# Altium PCB pcbsumo.PcbDoc
Units mm, origin at the board's own origin, x right, y up, seen from the top; angles counter-clockwise.
Board outline 79.88 x 72.38 mm, 2 copper layers (Top Layer, Bottom Layer); 32 components, 29 nets, 130 pads, 0 vias.
Unrouted connection lines stored in the file: 78.
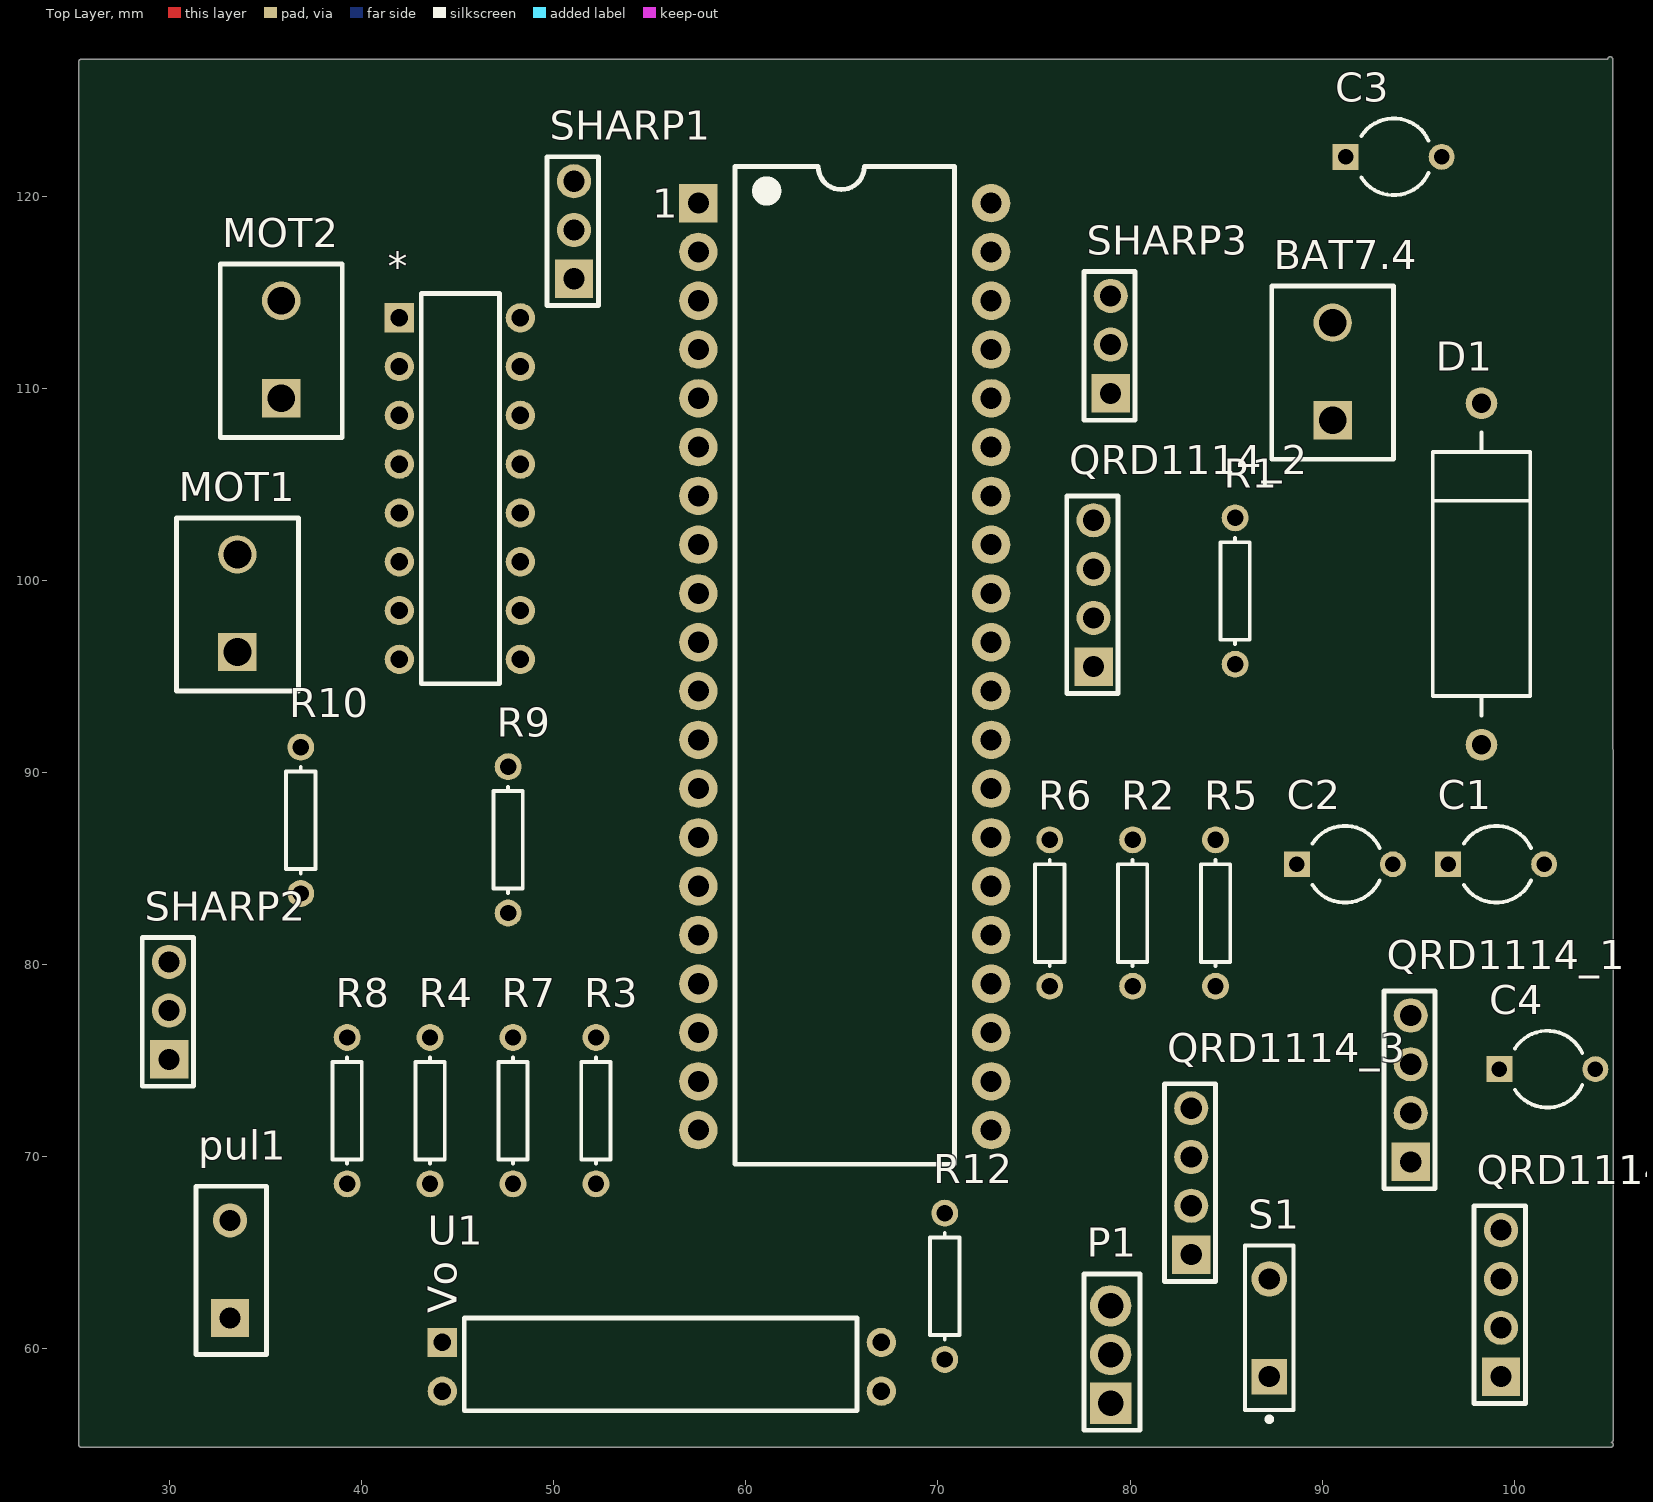
[diagram p0: Top Layer view]
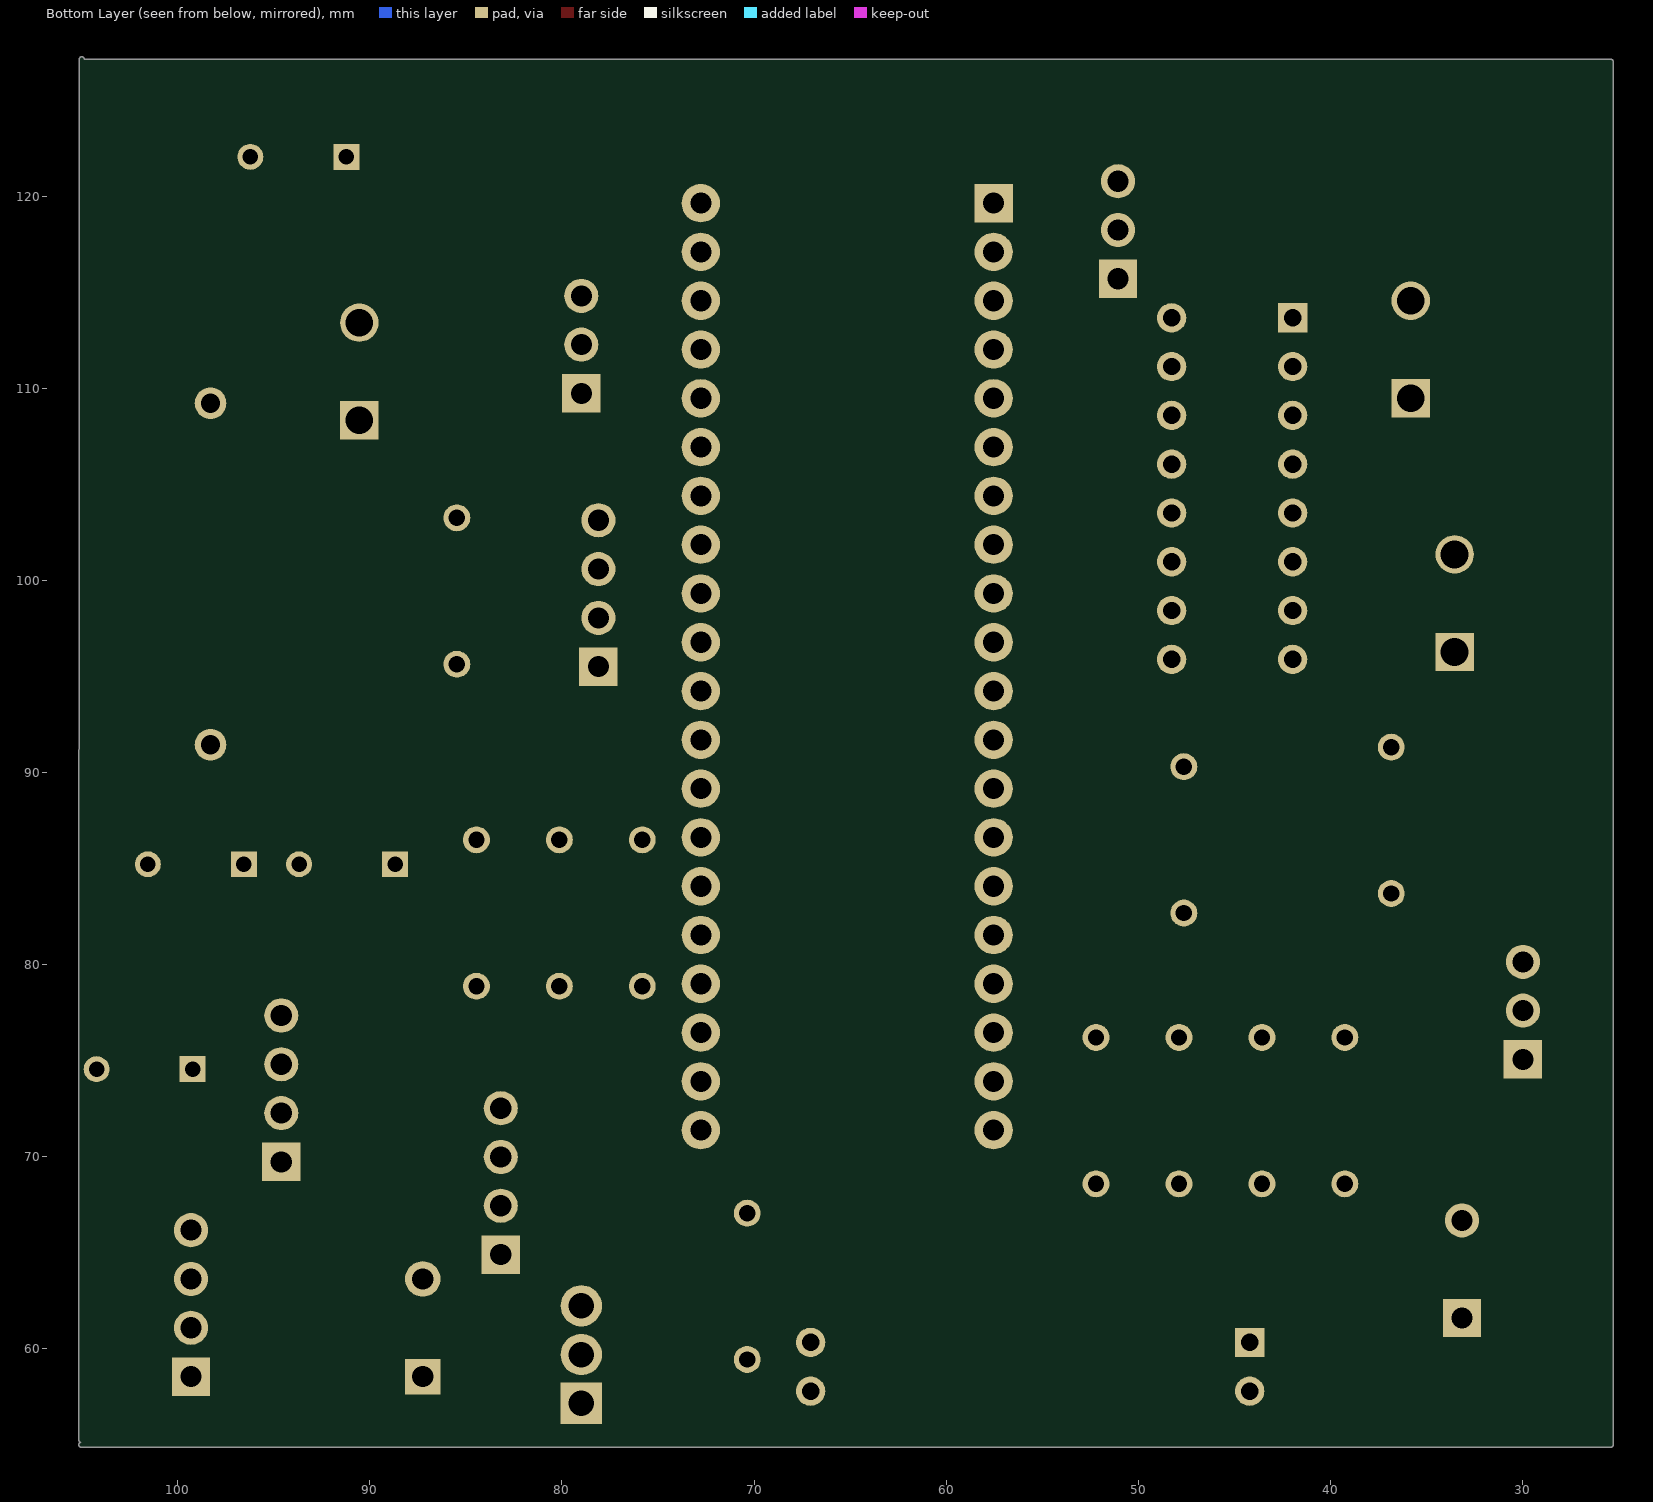
[diagram p1: Bottom Layer view, seen from below]

## Layer stack, top to bottom
Top Solder: solder mask 0.0102, Solder Resist, Dk 3.5
Top Layer: signal copper 0.0356
Dielectric 1: dielectric 0.32, FR-4, Dk 4.8
Bottom Layer: signal copper 0.0356
Bottom Solder: solder mask 0.0102, Solder Resist, Dk 3.5

## Board outline
25.4,54.873 cw(c25.4,55) 25.273,55 25.273,127 cw(c25.4,127) 25.4,127.127 104.873,127.127 cw(c105,127.127) 105.127,127.127 105.156,55.245 cw(c105.029,55.245) 105.156,55.245 cw(c105.029,55.245) 105.064,55.123 105.064,55.122 cw(c105.029,55) 105.156,55 cw(c105.029,55) 105.029,54.873

## Design rules (kind name [scope] priority, off if disabled: settings)
Clearance [All] p1: gap=0.254 ignorepadtopadclearanceinfootprint=FALSE except(0: Arc-Hole Track-Hole SMDPad-Hole THPad-Hole Via-Hole Fill-Hole Poly-Hole Region-Hole Text-Hole)
PolygonConnect [All] p1: connectstyle=Relief reliefconductorwidth=0.254 reliefentries=4 polygonreliefangle="90 Angle" airgapwidth=0.254
RoutingVias [All] p1: holewidth=0.711 width=1.27 viastyle="Through Hole" minholewidth=0.711 minwidth=1.27 maxholewidth=0.711 maxwidth=1.27
SolderMaskExpansion [All] p1: expansion=0.102
Width [All] p1: maxlimit=0.254 minlimit=0.254 preferedwidth=0.254
30 further rules are at their usual default settings.

## Components (designator, comment, footprint, x,y, rotation, side; value= is the part's Value field where it differs from the comment)
* "L293D" DIP16 41.96,108.585 r90 top
BAT7.4 "BORNERA1X2" BORN1X2 92.456,107.696 r90 top
C1 "Cap2" CAPR5-4X5 99.06,85.217 r0 top value=0.33uF
C2 "Cap2" CAPR5-4X5 91.186,85.217 r0 top value=0.1uF
C3 "Cap2" CAPR5-4X5 93.726,122.047 r0 top value=100uF
C4 "Cap2" CAPR5-4X5 101.727,74.549 r0 top value=100uF
D1 "D Zener" DIODE-0.7 98.298,100.33 r90 top
MOT1 "BORNERA1X2" BORN1X2 35.433,95.631 r90 top
MOT2 "BORNERA1X2" BORN1X2 37.719,108.839 r90 top
P1 "LM7805" TO-220A 78.994,57.15 r90 top
pul1 "Pulsador2" PULSADOR 33.147,61.595 r90 top
QRD1114_1 "Connector header 4P" "HEADER 1X4" 94.615,69.723 r90 top
QRD1114_2 "Connector header 4P" "HEADER 1X4" 78.105,95.504 r90 top
QRD1114_3 "Connector header 4P" "HEADER 1X4" 83.185,64.897 r90 top
QRD1114_4 "Connector header 4P" "HEADER 1X4" 99.314,58.547 r90 top
R1 "Res1" AXIAL-0.3 85.471,99.441 r90 top value=4.7K
R2 "Res1" AXIAL-0.3 80.137,82.677 r90 top value=4.7K
R3 "Res1" AXIAL-0.3 52.197,72.39 r90 top value=4.7K
R4 "Res1" AXIAL-0.3 43.561,72.39 r90 top value=4.7K
R5 "Res1" AXIAL-0.3 84.455,82.677 r90 top value=150
R6 "Res1" AXIAL-0.3 75.819,82.677 r90 top value=150
R7 "Res1" AXIAL-0.3 47.879,72.39 r90 top value=150
R8 "Res1" AXIAL-0.3 39.243,72.39 r90 top value=150
R9 "Res1" AXIAL-0.3 47.625,86.487 r90 top value=8M
R10 "Res1" AXIAL-0.3 36.83,87.503 r90 top value=6M
R12 "Res1" AXIAL-0.3 70.358,63.246 r90 top value=220
S1 "SW-PB" SPST-2 87.249,61.087 r90 top
SHARP1 "Connector header 3P" "HEADER 1X3" 51.054,115.697 r90 top
SHARP2 "Connector header 3P" "HEADER 1X3" 29.972,75.057 r90 top
SHARP3 "Connector header 3P" "HEADER 1X3" 78.994,109.728 r90 top
U1 "Mod regu 3.3" ASM1117 44.196,55.245 r90 top
? "BLUE PILL" DIP40 57.531,119.634 r0 top

## Footprints (in the part's own frame and the unit in brackets; to place one, negate y for a bottom-side part, rotate by r counter-clockwise, add the part's x,y. Pads: shape width x height; smd on the part's side, far side on the other; paste and mask are expansions set on the pad)
ASM1117 [mil] "Modulo 3.3v"
  rect 60x60 hole 35.43: 1(200,0)
  round 60 hole 35.43: 2(100,0) 3(100,-900) 4(200,-900)
  silkscreen extent 60,-850 250,-45
AXIAL-0.3 [mm] "Axial Device, Thru-Hole; 2 Leads; 0.3 in Pin Spacing"
  round 1.4 hole 0.85: 1(-3.81,0) 2(3.81,0)
  silkscreen extent -2.77,-0.76 2.77,0.76
BORN1X2 [mm]
  rect 2x2 hole 1.45: 1(0.635,1.905)
  round 2 hole 1.45: 2(5.715,1.905)
  silkscreen extent -1.4,-1.27 7.62,5.08
CAPR5-4X5 [mm] "Capacitor; 2 Leads"
  rect 1.35x1.35 hole 0.8: 1(-2.5,0)
  round 1.35 hole 0.8: 2(2.5,0)
  silkscreen extent -1.69,-2 1.82,2
DIODE-0.7 [mm] "Diode, Thru-Hole; 2 Leads; 0.7 in Pin Spacing"
  round 1.65 hole 1: 1(-8.89,0) 2(8.89,0)
  silkscreen extent -7.37,-2.54 7.37,2.54
DIP16 [mil]
  rect 60x60 hole 35.43: 1(200,0)
  round 60 hole 35.43: 2(100,0) 3(0,0) 4(-100,0) 5(-200,0) 6(-300,0) 7(-400,0) 8(-500,0) 9(-500,-248.03) 10(-400,-248.03) 11(-300,-248.03) 12(-200,-248.03) 13(-100,-248.03) 14(0,-248.03) 15(100,-248.03) 16(200,-248.03)
  silkscreen extent -550,-205 250,-45
DIP40 [mm]
  rect 2x2 hole 1.1: 1(0,0)
  round 2 hole 1.1: 2(0,-2.54) 3(0,-5.08) 4(0,-7.62) 5(0,-10.16) 6(0,-12.7) 7(0,-15.24) 8(0,-17.78) 9(0,-20.32) 10(0,-22.86) 11(0,-25.4) 12(0,-27.94) 13(0,-30.48) 14(0,-33.02) 15(0,-35.56) 16(0,-38.1) 17(0,-40.64) 18(0,-43.18) 19(0,-45.72) 20(0,-48.26) 21(15.24,-48.26) 22(15.24,-45.72) 23(15.24,-43.18) 24(15.24,-40.64) 25(15.24,-38.1) 26(15.24,-35.56) 27(15.24,-33.02) 28(15.24,-30.48) 29(15.24,-27.94) 30(15.24,-25.4) 31(15.24,-22.86) 32(15.24,-20.32) 33(15.24,-17.78) 34(15.24,-15.24) 35(15.24,-12.7) 36(15.24,-10.16) 37(15.24,-7.62) 38(15.24,-5.08) 39(15.24,-2.54) 40(15.24,0)
  silkscreen extent 1.91,-50.04 13.33,1.91
"HEADER 1X3" [mm]
  rect 2x2 hole 1.1: 1(0,0)
  round 1.778 hole 1.1: 2(2.54,0) 3(5.08,0)
  silkscreen extent -1.4,-1.27 6.35,1.4
"HEADER 1X4" [mm]
  rect 2x2 hole 1.1: 1(0,0)
  round 1.778 hole 1.1: 2(2.54,0) 3(5.08,0) 4(7.62,0)
  silkscreen extent -1.4,-1.27 8.89,1.4
PULSADOR [mm]
  rect 2x2 hole 1.1: 1(0,0)
  round 1.778 hole 1.1: 2(5.08,0)
  silkscreen extent -1.91,-1.91 6.86,1.78
SPST-2 [mm] "Switch; 2 Leads"
  rect 1.85x1.85 hole 1.1: 1(-2.54,0)
  round 1.85 hole 1.1: 2(2.54,0)
  silkscreen extent -4.89,-1.27 4.28,1.27
TO-220A [mm] "Regulador de voltaje positivo, de 5 voltios y 1A de salida. Empaque TO-220."
  rect 2.15x2.15 hole 1.33: 1(0,0)
  round 2.15 hole 1.33: 2(2.54,0) 3(5.08,0)
  silkscreen extent -1.4,-1.52 6.73,1.4

## Part data
*: "TB6612FNG"
BAT7.4 MOT1 MOT2: "Optoacoplador con fototransistor de salida y conexión a base. Voltaje de aislamiento de prueba 5300 VRMS, capacitancia entrada -salida < 0.5 pF. Empaque 6-DIP."
C1 C2 C3 C4: "Capacitor", PackageDescription="Capacitor; 2 Leads", PackageReference=CAPR5-4X5, Published=23-Sep-2002, Publisher="Altium Limited"
D1: "Zener Diode", LatestRevisionDate=17-Jul-2002, LatestRevisionNote="Re-released for DXP Platform.", PackageDescription="Diode, Thru-Hole; 2 Leads; 0.7 in Pin Spacing", PackageReference=DIODE-0.7, Published=8-Jun-2000, Publisher="Altium Limited"
P1: "D39 IC REGULATOR 5VOLT LM7805 THT"
QRD1114_1 QRD1114_2 QRD1114_3 QRD1114_4: "Header, 4-Pin"
R1 R2 R3 R4 R5 R6 R7 R8 R9 R10 R12: "Resistor", LatestRevisionDate=17-Jul-2002, LatestRevisionNote="Re-released for DXP Platform.", PackageDescription="Axial Device, Thru-Hole; 2 Leads; 0.3 in Pin Spacing", PackageReference=AXIAL-0.3, Published=8-Jun-2000, Publisher="Altium Limited"
S1: "Switch", LatestRevisionDate=17-Jul-2002, LatestRevisionNote="Re-released for DXP Platform.", PackageDescription="Switch; 2 Leads", PackageReference=SPST-2, Published=24-Mar-1999, Publisher="Altium Limited"
SHARP1 SHARP2 SHARP3: "Header, 3-Pin"
U1: library part ASM1117, "Optoacoplador con fototransistor de salida y conexión a base. Voltaje de aislamiento de prueba 5300 VRMS, capacitancia entrada -salida < 0.5 pF. Empaque 6-DIP."
?: "DIP20 STM32F103C8T6"

## Nets (pads, with @x,y where several pads share a name; then routed paths per layer and width w, separated by ;. In a path a pad name is that pad's centre, name@x,y a point inside that pad or via, vN(x,y) a via of type N, cw(c..) or ccw(c..) an arc to the next point about the centre after c; other vN are vias at no path point)
5V: *.16 ?.18 C2.1 C3.1 P1.3 SHARP1.2 SHARP2.2 SHARP3.2
GND: *.4 *.5 *.12 *.13 ?.19 BAT7.4.2 C1.2 C2.2 C3.2 C4.2 D1.1 P1.2 QRD1114_1.3 QRD1114_1.4 QRD1114_2.3 QRD1114_2.4 QRD1114_3.3 QRD1114_3.4 QRD1114_4.3 QRD1114_4.4 R10.2 R12.2 SHARP1.3 SHARP2.3 SHARP3.3 U1.2 U1.3
Net*_1: *.1 ?.5
Net*_2: *.2 ?.1
Net*_3: *.3 MOT1.2
Net*_6: *.6 MOT1.1
Net*_7: *.7 ?.2
Net*_8: *.8 C1.1 C4.1 P1.1 R9.1 S1.1 U1.4
Net*_9: *.9 ?.6
Net*_10: *.10 ?.35
Net*_11: *.11 MOT2.2
Net*_14: *.14 MOT2.1
Net*_15: *.15 ?.36
Net_8: ?.8 pul1.2
Net_12: ?.12 QRD1114_4.1 R4.2
Net_13: ?.13 QRD1114_3.1 R3.2
Net_25: ?.25 SHARP1.1
Net_26: ?.26 SHARP2.1
Net_27: ?.27 SHARP3.1
Net_28: ?.28 D1.2 R9.2 R10.1
Net_31: ?.31 QRD1114_2.1 R2.2
Net_32: ?.32 QRD1114_1.1 R1.2
NetBAT7.4_1: BAT7.4.1 S1.2
Netpul1_1: pul1.1 R12.1
NetQRD1114_1_2: QRD1114_1.2 R5.2
NetQRD1114_2_2: QRD1114_2.2 R6.2
NetQRD1114_3_2: QRD1114_3.2 R7.2
NetQRD1114_4_2: QRD1114_4.2 R8.2
NetR1_1: R1.1 R2.1 R3.1 R4.1 R5.1 R6.1 R7.1 R8.1 U1.1
pads on no net: ?.3 ?.4 ?.7 ?.9 ?.10 ?.11 ?.14 ?.15 ?.16 ?.17 ?.20 ?.21 ?.22 ?.23 ?.24 ?.29 ?.30 ?.33 ?.34 ?.37 ?.38 ?.39 ?.40

## Silkscreen, mask and mechanical layers (free items; w line width, h text height)
Mechanical 1:
  lines w0.254: 105.029,55 25.4,55 25.4,127 104.873,127 105,127.127 105.029,55.245

## Text inside footprints (layer, text, board x,y; h text height)
U1: Top Overlay "Vo" at 44.958,61.849 h1.52 r90
?: Top Overlay "1" at 55.118,118.872 h1.52